# Altium PCB MT-SWD V1.0.0.PcbDoc
Units mm, origin at the board's own origin, x right, y up, seen from the top; angles counter-clockwise.
Board outline 28 x 15 mm, 2 copper layers (Top Layer, Bottom Layer); 2 components, 8 nets, 24 pads, 1 vias.
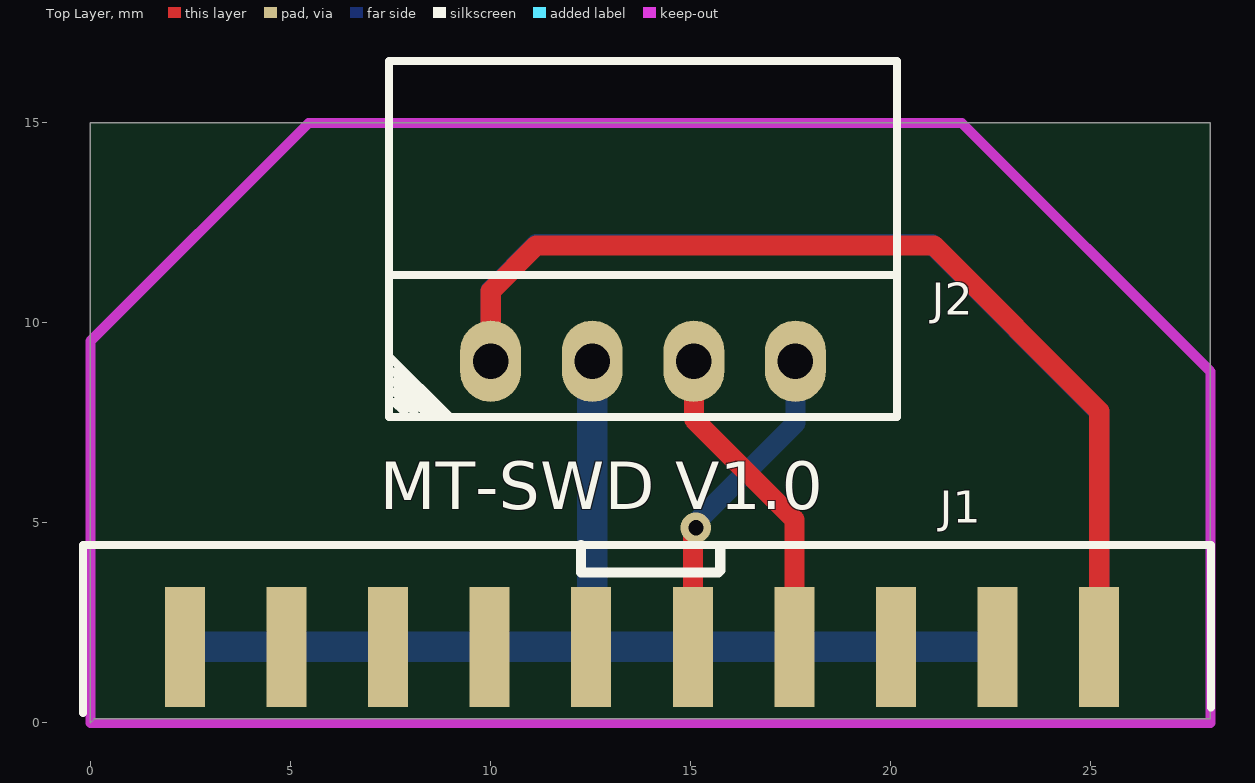
[diagram p0: Top Layer view]
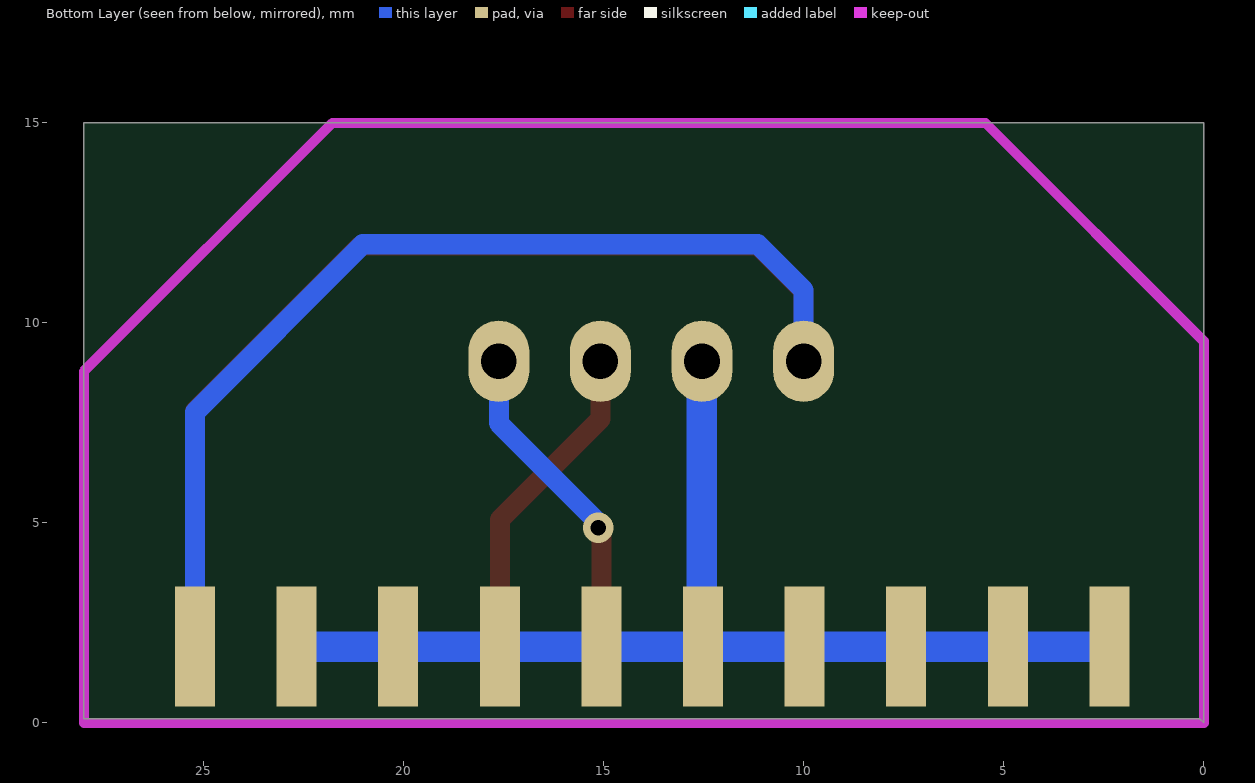
[diagram p1: Bottom Layer view, seen from below]

## Layer stack, top to bottom
Top Layer: signal copper 0.0356
Dielectric: dielectric 0.32, FR-4, Dk 4.8
Bottom Layer: signal copper 0.0356

## Board outline
0,15 28,15 28,0.102 0.102,0.102 0,0 0,15

## Design rules (kind name [scope] priority, off if disabled: settings)
Clearance Clearance_1 [INPolygon] p1: gap=0.381
Clearance [All] p2: gap=0.152
ComponentClearance [All] p1 off: gap=0 collisioncheckmode=3 verticalgap=0 showdistances=FALSE
HoleSize [All] p1: absolutevalues=TRUE maxlimit=12.7 minlimit=0.025 maxpercent=80.000 minpercent=20.000
HoleToHoleClearance [All] p1 off: gap=0.254 allowstackedmicrovias=TRUE
MinimumSolderMaskSliver [All] p1: minsoldermaskwidth=0
NetAntennae [All] p1: netantennaetolerance=0.254
PlaneConnect PlaneConnect_1 [All] p1: planeconnectstyle=NoConnect reliefexpansion=0.508 reliefentries=4 reliefconductorwidth=0.254 reliefairgap=0.254
PolygonConnect PolygonConnect_1 [IsVia] p1: connectstyle=Direct reliefconductorwidth=0.254 reliefentries=4 polygonreliefangle="90 Angle" airgapwidth=0.254
PolygonConnect [All] p2: connectstyle=Direct reliefconductorwidth=0.254 reliefentries=4 polygonreliefangle="90 Angle" airgapwidth=0.254
RoutingVias [All] p1: holewidth=0.305 width=0.61 viastyle="Through Hole" minholewidth=0.254 minwidth=0.457 maxholewidth=10 maxwidth=10
SilkToSilkClearance [All] p1: silktosilkclearance=0
SilkToSolderMaskClearance [IsPad] p1: minsilkscreentomaskgap=0 clearancetoexposedcopper=TRUE
SolderMaskExpansion [All] p1: expansion=0.102
Width Width_1 [All] p1: maxlimit=1.27 minlimit=0.127 preferedwidth=0.254
20 further rules are at their usual default settings.

## Components (designator, comment, footprint, x,y, rotation, side; value= is the part's Value field where it differs from the comment)
J1 "JTAG" FH12-10S-1SH 2.362,1.905 r0 top
J2 "CON4" COM4-2.54mm-90 10.008,9.042 r0 top

## Footprints (in the part's own frame and the unit in brackets; to place one, negate y for a bottom-side part, rotate by r counter-clockwise, add the part's x,y. Pads: shape width x height; smd on the part's side, far side on the other; paste and mask are expansions set on the pad)
COM4-2.54mm-90 [mil]
  oval 60x80 hole 35: 1(0,0) 2(100,0) 3(200,0) 4(300,0)
  silkscreen extent -100,-55 400,295
FH12-10S-1SH [mm]
  rect 1x3 smd: 1(22.86,-0.005) 3(20.32,-0.005) 5(17.78,-0.005) 7(15.24,-0.005) 9(12.7,-0.005) 11(10.16,-0.005) 13(7.62,-0.005) 15(5.08,-0.005) 17(2.54,-0.005) 19(0,-0.005)
  rect 1x3 smd far side: 2(22.86,0.005) 4(20.32,0.005) 6(17.78,0.005) 8(15.24,0.005) 10(12.7,0.005) 12(10.16,0.005) 14(7.62,0.005) 16(5.08,0.005) 18(2.54,0.005) 20(0,0.005)
  silkscreen extent -2.54,-1.65 25.65,2.54

## Part data
J1: library part "HEADER 10X2"
J2: "Connector"

## Via types
v1: diameter 0.762, hole 0.381, Top Layer to Bottom Layer, 1 vias

## Nets (pads, with @x,y where several pads share a name; then routed paths per layer and width w, separated by ;. In a path a pad name is that pad's centre, name@x,y a point inside that pad or via, vN(x,y) a via of type N, cw(c..) or ccw(c..) an arc to the next point about the centre after c; other vN are vias at no path point)
DGND: J1.4 J1.6 J1.8 J1.10 J1.12 J1.14 J1.16 J1.18 J1.20 J2.2 | length 27.5
  Bottom Layer w0.762: J1.20 J1.18 J1.16 J1.14 J1.12 ; J2.2 12.548,1.935 J1.12 ; J1.4 J1.6 J1.8 J1.10 J1.12
DP3V3: J1.1 J1.2 J2.1 | length 50.1
  Top Layer w0.508: J2.1 10.008,10.795 11.151,11.938 21.082,11.938 25.222,7.798 J1.1
  Bottom Layer w0.508: J2.1 10.008,10.82 11.151,11.963 21.031,11.963 25.222,7.772 J1.2
NRST: J1.15
NTRST: J1.3
TCK: J1.9 J2.4 | length 8.2
  Top Layer w0.5: J1.9 15.062,4.801 v1(15.138,4.877)
  Bottom Layer w0.5: v1(15.138,4.877) 15.138,5.004 17.628,7.493 J2.4
TDI: J1.5
TDO: J1.13
TMS: J1.7 J2.3 | length 8.2
  Top Layer w0.5: J2.3 15.088,7.595 17.602,5.08 J1.7
pads on no net: J1.11 J1.17 J1.19

## Keep-outs
Keep-Out Layer:
  lines w0.254: 0,0 28,0 28,8.788 21.788,15 21.742,15 5.458,15 0,9.542 0,8.89 0,0

## Silkscreen, mask and mechanical layers (free items; w line width, h text height)
Top Overlay:
  lines w0.254: 12.268,4.445 12.268,3.759 15.697,3.759 15.748,3.81 15.748,4.369
  text "MT-SWD V1.0" at 7.239,4.953 h2.03